# EAGLE board boardv2a (EAGLE 6.6.0), part 1 of 3
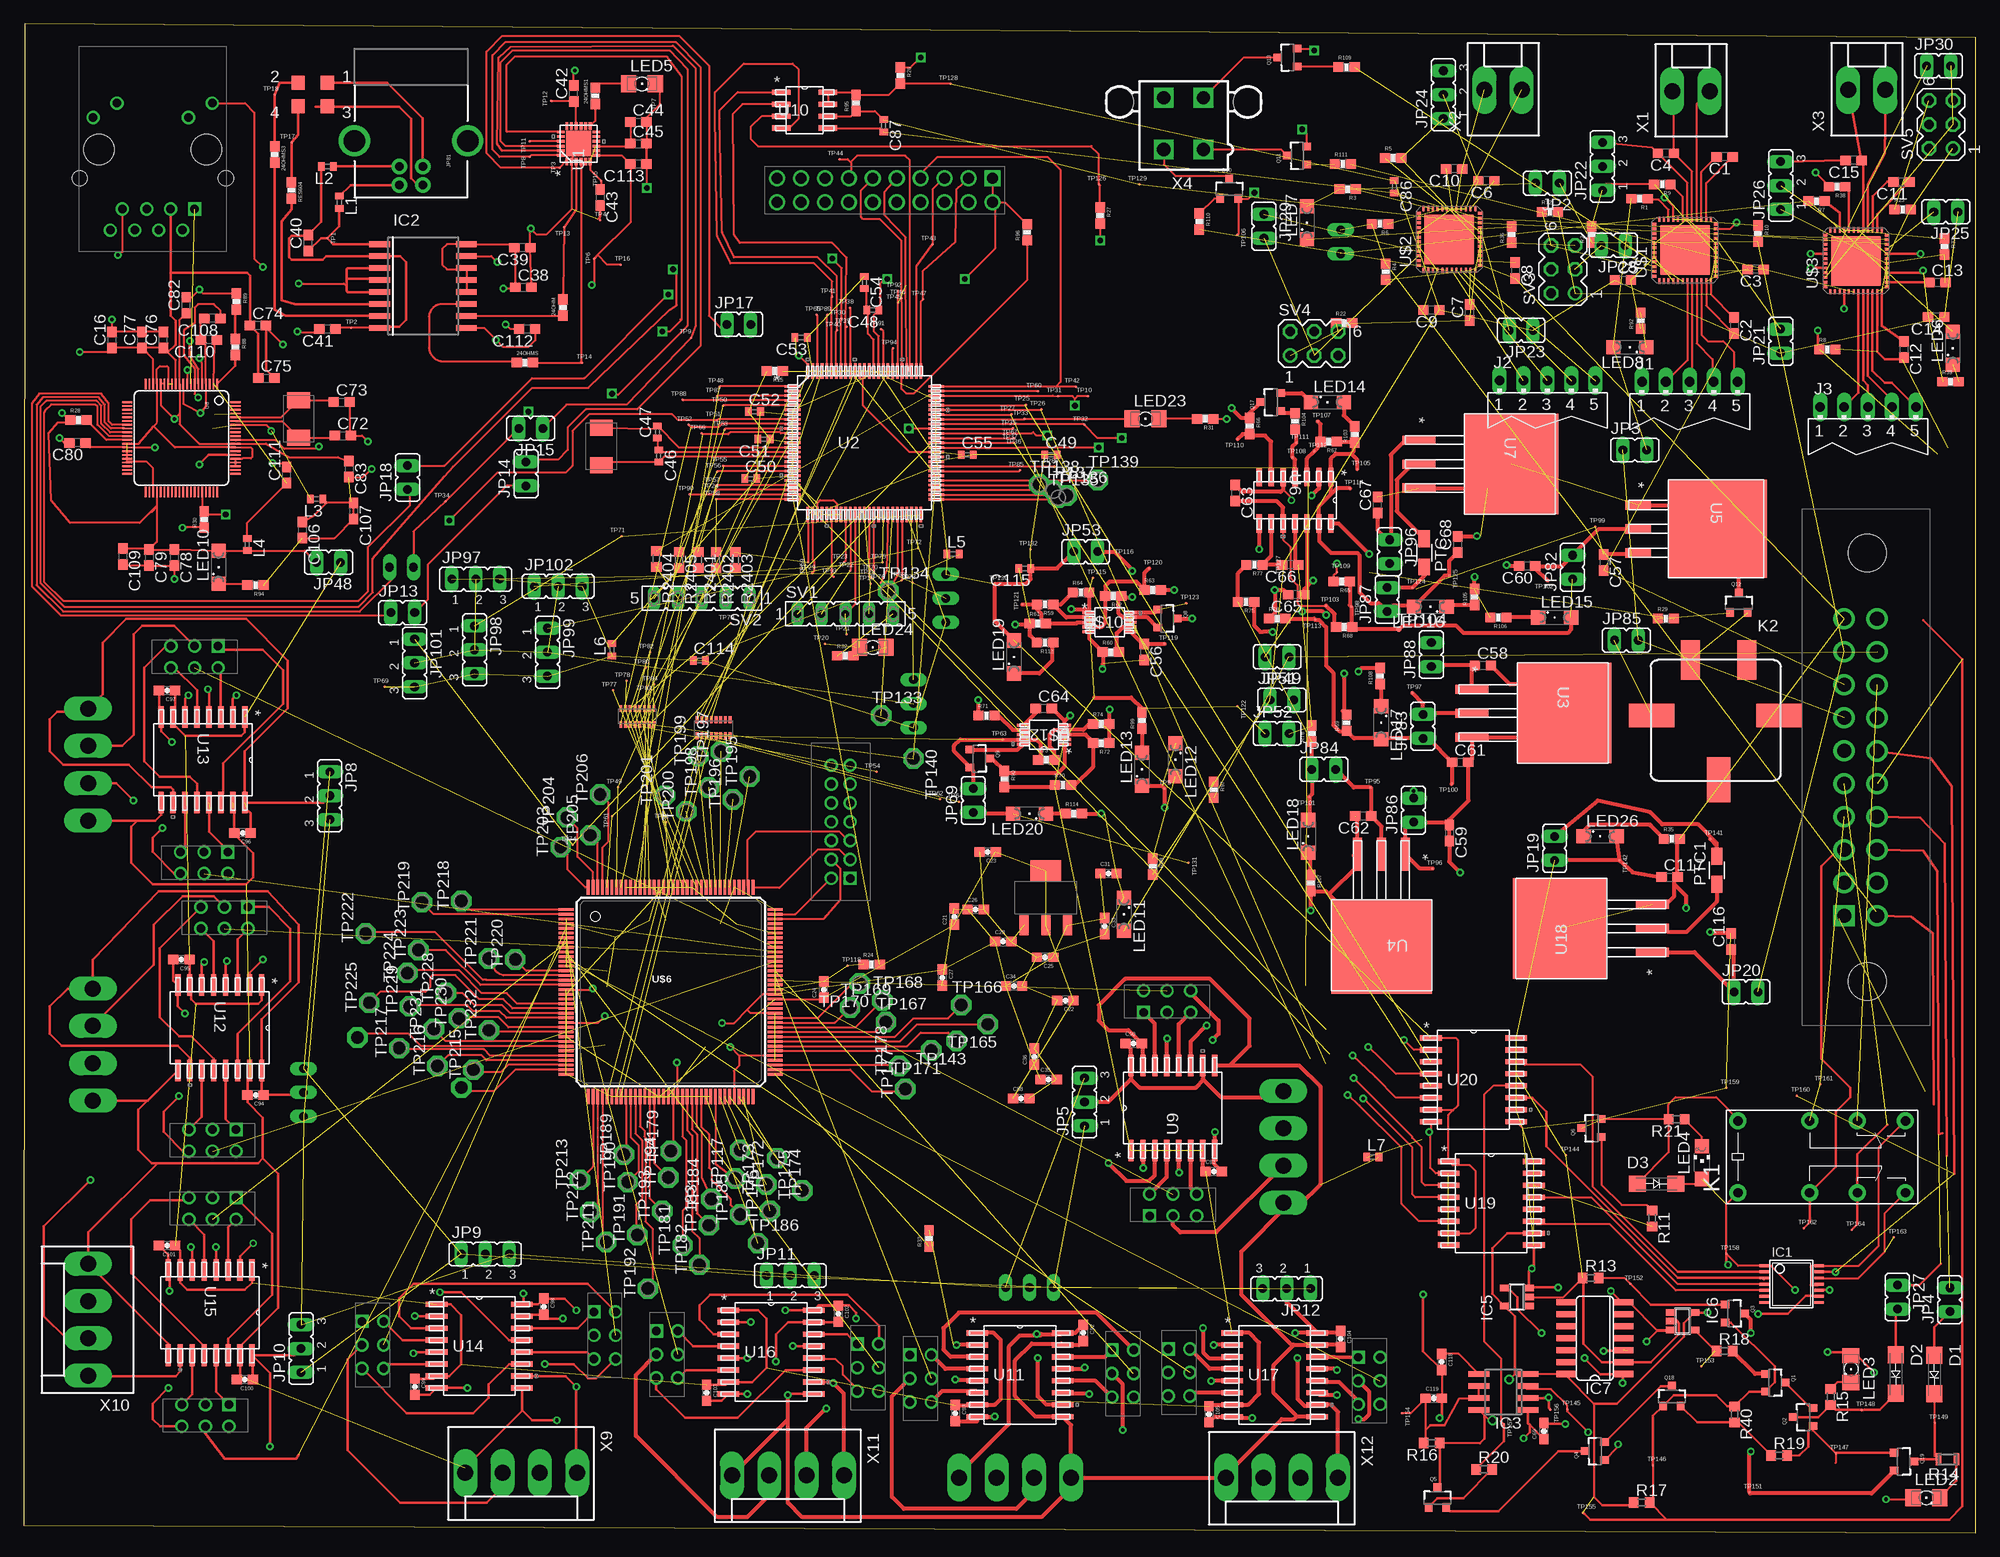
[diagram p0: board, top side]
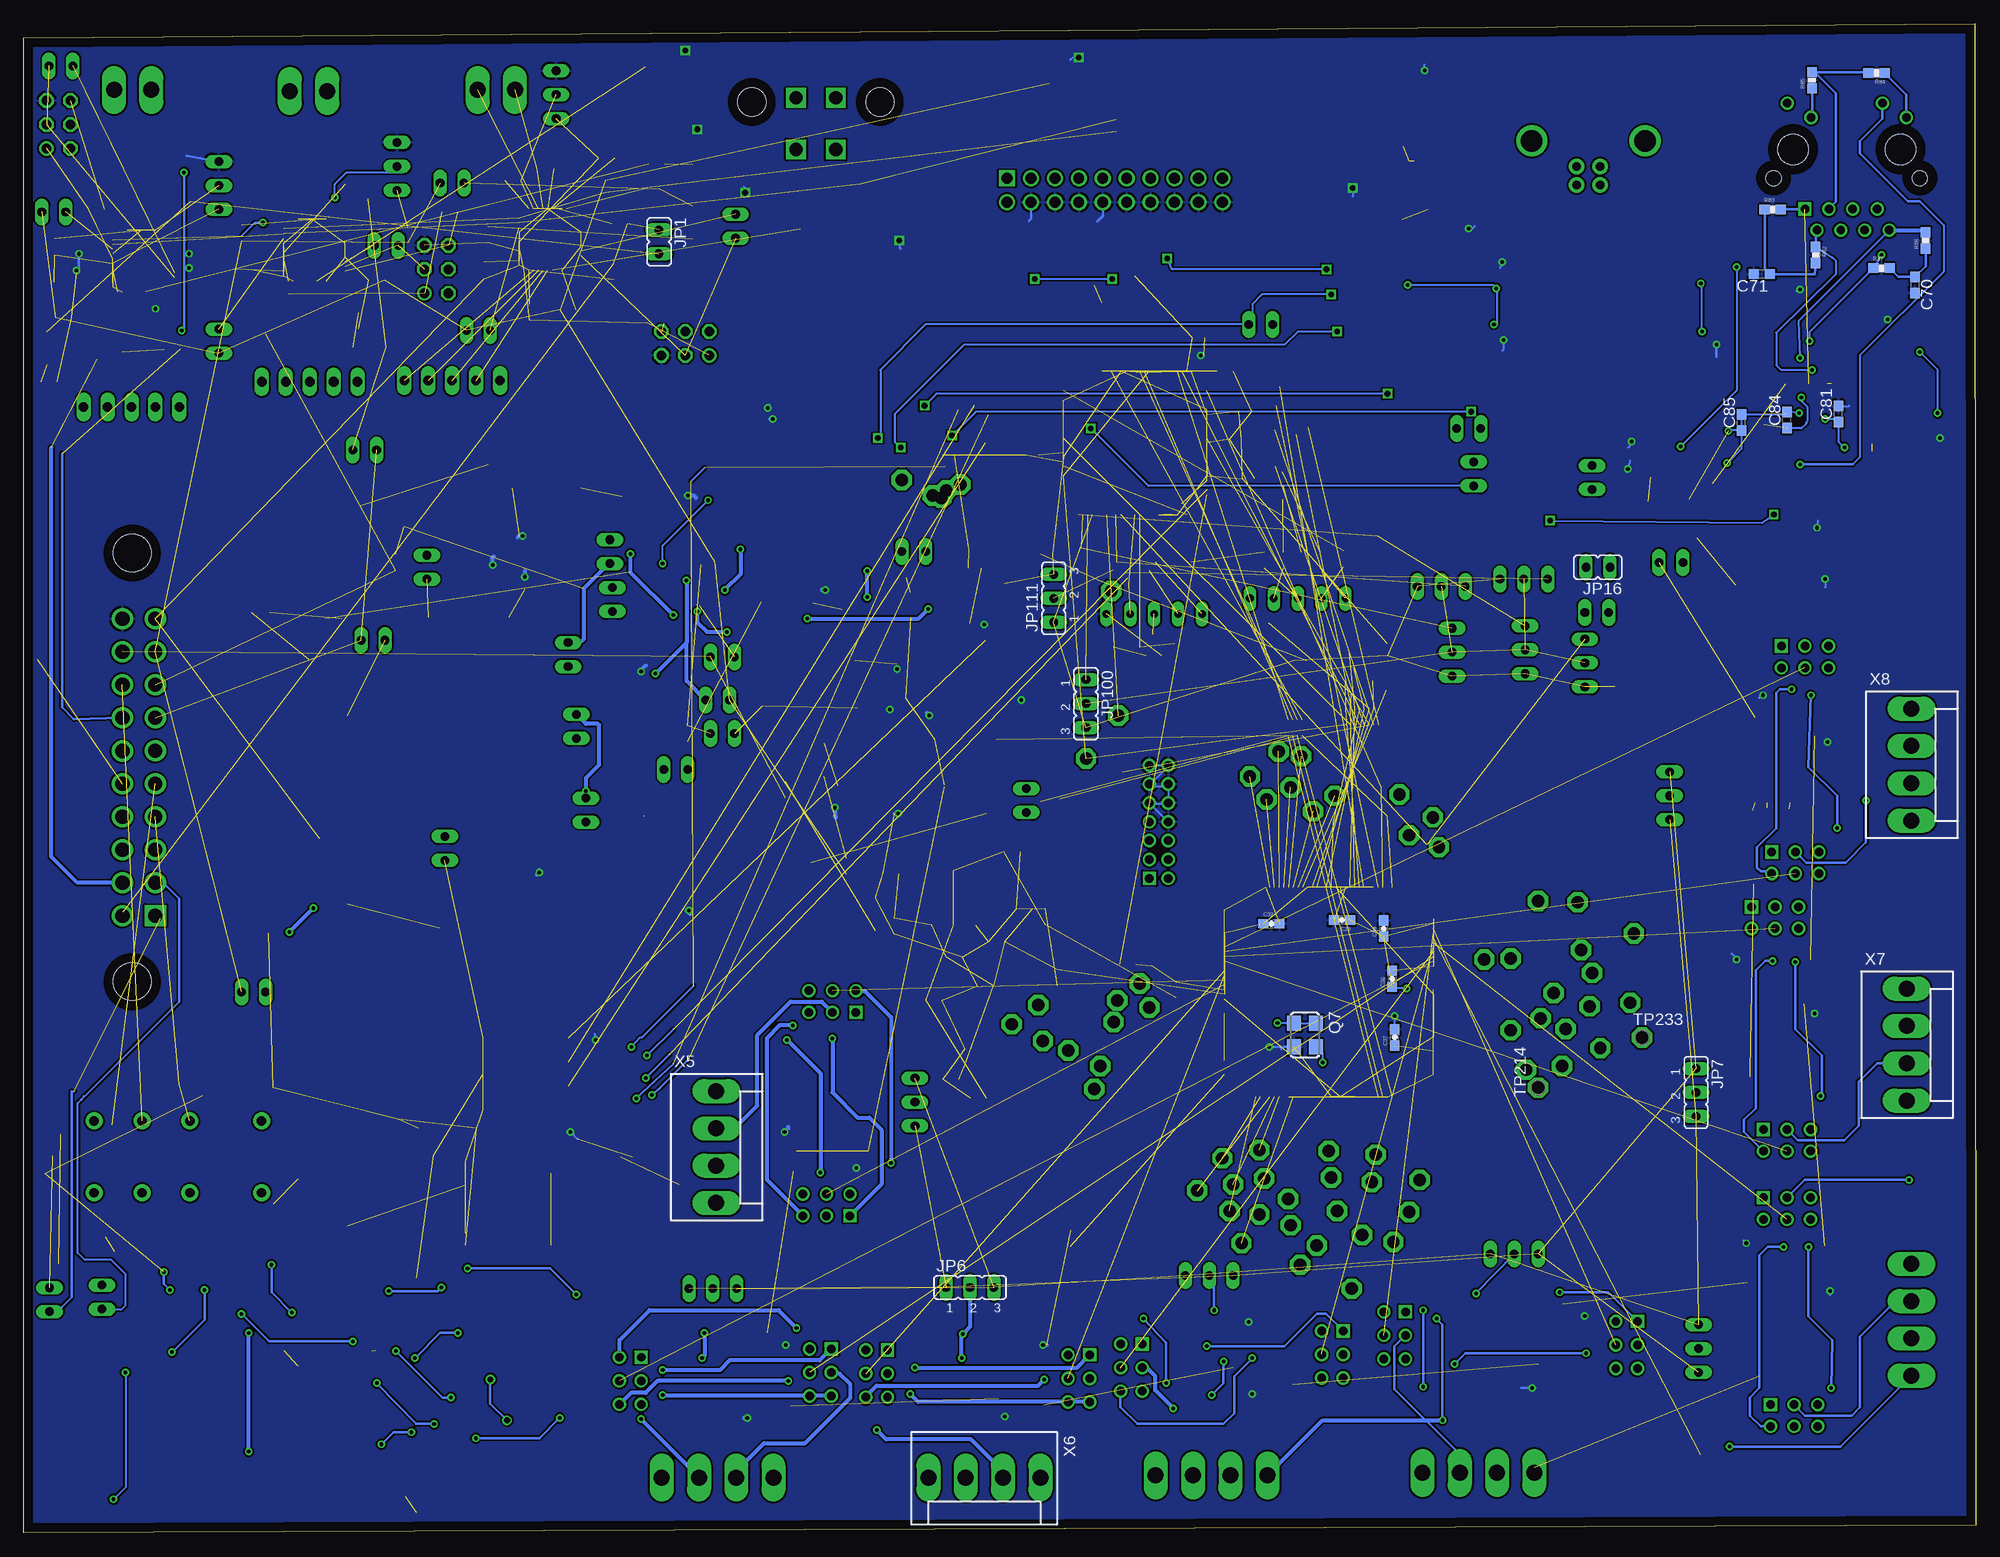
[diagram p1: board, bottom side, seen from below]

Size 207.29 x 160.22 mm. Coordinates in mm from the lower left corner, seen from the top.
Outline: 0,0.84 207.27,0 207.29,158.72 0.13,160.22 0,0.84
Copper layers (1*16): Top 0.035mm / dielectric 1.5mm / Bottom 0.035mm
Design rules "default": minimum track width 10mil, minimum drill 24mil, track to track 8mil, track to pad 8mil, pad to pad 8mil, via to via 8mil, smd to smd 8mil, copper to edge 40mil, drill to drill 8mil, minimum pad ring 10mil, minimum via ring 8mil, stop-mask expansion 4mil, vias tented up to drill 0mil, thermal gap 10mil
Net classes: 0 default: width 0.203 mm, drill 0.406 mm, clearance 0.102 mm

## Footprints (pad centres in the part's own frame; a part is rotated, then mirrored left to right if it is on the bottom)
0603-RES = smd 1.1 x 1: 1 -0.85,0; 2 0.85,0
C0603 = smd 1.1 x 1: 1 -0.85,0; 2 0.85,0
0603-CAP = smd 1.1 x 1: 1 -0.85,0; 2 0.85,0
C0402 = smd 0.7 x 0.9: 1 -0.65,0; 2 0.65,0
SMA-DO214AC = smd 1.8 x 1.7: A -2.05,0; K 2.05,0
TSSOP14 = smd 0.305 x 0.991: 1 -1.95,-2.918; 2 -1.3,-2.918; 3 -0.65,-2.918; 4 0,-2.918; 5 0.65,-2.918; 6 1.3,-2.918; 7 1.95,-2.918; 8 1.95,2.918; 9 1.3,2.918; 10 0.65,2.918; 11 0,2.918; 12 -0.65,2.918; 13 -1.3,2.918; 14 -1.95,2.918
SO16W = smd 0.6 x 2.2: 1 -4.445,-4.6; 2 -3.175,-4.6; 3 -1.905,-4.6; 4 -0.635,-4.6; 5 0.635,-4.6; 6 1.905,-4.6; 7 3.175,-4.6; 8 4.445,-4.6; 9 4.445,4.6; 10 3.175,4.6; 11 1.905,4.6; 12 0.635,4.6; 13 -0.635,4.6; 14 -1.905,4.6; 15 -3.175,4.6; 16 -4.445,4.6
SO08 = smd 0.6 x 2.2: 1 -1.905,-2.6; 2 -0.635,-2.6; 3 0.635,-2.6; 4 1.905,-2.6; 5 1.905,2.6; 6 0.635,2.6; 7 -0.635,2.6; 8 -1.905,2.6
SOT23-5 = smd 0.69 x 0.99: 1 -0.95,-1.29; 2 0,-1.29; 3 0.95,-1.29; 4 0.95,1.3; 5 -0.95,1.3
SO14 = smd 0.66 x 2.032: 1 -3.81,-3.073; 2 -2.54,-3.073; 3 -1.27,-3.073; 4 0,-3.073; 5 1.27,-3.073; 6 2.54,-3.073; 7 3.81,-3.073; 8 3.81,3.073; 9 2.54,3.073; 10 1.27,3.073; 11 0,3.073; 12 -1.27,3.073; 13 -2.54,3.073; 14 -3.81,3.073
JU05 = drill 1.016 long: 1 -5.08,0; 2 -2.54,0; 3 0,0; 4 2.54,0; 5 5.08,0
JP1 = drill 0.914 long: 1 0,-1.27; 2 0,1.27
JP2 = drill 0.914 long: 1 -2.54,0; 2 0,0; 3 2.54,0
USB-B-PTH = drill 0.914 pad 1.676: D+ 0,1.25; D- 1.981,1.25; GND 0,-1.25; VBUS 1.981,-1.25 | drill 2.286: S1 -2.718,-6.02; S2 -2.718,6.02
G5V-2 = drill 1 pad 1.8: 1 -8.89,-3.81; 4 -1.27,-3.81; 6 3.81,-3.81; 8 8.89,-3.81; 9 8.89,3.81; 11 3.81,3.81; 13 -1.27,3.81; 16 -8.89,3.81
CP1SA = smd 2 x 4.2: 1 3,-5.9; 2 -3,-5.9 | smd 4.8 x 2.5: C 7.1,0; NO -6.4,0 | smd 2.5 x 4.8: NC 0,6.8
0402 = smd 0.7 x 0.9: 1 -0.65,0; 2 0.65,0
1206 = smd 1.6 x 1.803: A -1.422,0; C 1.422,0
CHIPLED_1206 = smd 1.5 x 1.5: A 0,-1.75; C 0,1.75
LED_1206 = smd 1.6 x 1.803: A -1.422,0; C 1.422,0
SML1206 = smd 1.5 x 1.5: A 1.75,0; C -1.75,0
R1206W = smd 1.8 x 1.2: 1 -1.499,0; 2 1.499,0
SOT23-3 = smd 0.8 x 0.9: 1 -0.95,-1; 2 0.95,-1; 3 0,1.1
ASF = smd 1.6 x 1.5: 1 -1.25,-1.15; 2 1.25,-1.15; 3 1.25,1.15; 4 -1.25,1.15
R0603 = smd 1 x 1.1: 1 -0.85,0; 2 0.85,0
MINI_MELF-0102W = smd 0.6 x 1.3: 1 -0.95,0; 2 0.95,0
FE05-1 = drill 0.813 long: 1 -5.08,0; 2 -2.54,0; 3 0,0; 4 2.54,0; 5 5.08,0
MA03-2 = drill 1.016: 1 -2.54,-1.27 | drill 1.016 octagon: 2 -2.54,1.27; 3 0,-1.27; 4 0,1.27; 5 2.54,-1.27; 6 2.54,1.27
B1,27 = smd 0.254 x 0.254: TP 0,0
B2,54 = smd 0.254 x 0.254: TP 0,0
TP06R = smd 0.6 x 0.6: TP 0,0
P1-13 = drill 1.321 pad 2.159 octagon: TP 0,0
QFN24_4X4 = smd 0.813 x 0.305: 1 -1.88,1.245; 2 -1.88,0.762; 3 -1.88,0.254; 4 -1.88,-0.254; 5 -1.88,-0.762; 6 -1.88,-1.245; 13 1.88,-1.245; 14 1.88,-0.762; 15 1.88,-0.254; 16 1.88,0.254; 17 1.88,0.762; 18 1.88,1.245 | smd 0.305 x 0.813: 7 -1.245,-1.88; 8 -0.762,-1.88; 9 -0.254,-1.88; 10 0.254,-1.88; 11 0.762,-1.88; 12 1.245,-1.88; 19 1.245,1.88; 20 0.762,1.88; 21 0.254,1.88; 22 -0.254,1.88; 23 -0.762,1.88; 24 -1.245,1.88 | smd 2.692 x 2.692: 25 0,0
PZ100 = smd 1.676 x 0.279: 1 -7.62,5.994; 2 -7.62,5.512; 3 -7.62,5.004; 4 -7.62,4.496; 5 -7.62,3.988; 6 -7.62,3.505; 7 -7.62,2.997; 8 -7.62,2.489; 9 -7.62,2.007; 10 -7.62,1.499; 11 -7.62,0.991; 12 -7.62,0.508; 13 -7.62,0; 14 -7.62,-0.508; 15 -7.62,-0.991; 16 -7.62,-1.499; 17 -7.62,-2.007; 18 -7.62,-2.489; 19 -7.62,-2.997; 20 -7.62,-3.505; 21 -7.62,-3.988; 22 -7.62,-4.496; 23 -7.62,-5.004; 24 -7.62,-5.512; 25 -7.62,-5.994; 51 7.62,-5.994; 52 7.62,-5.512; 53 7.62,-5.004; 54 7.62,-4.496; 55 7.62,-3.988; 56 7.62,-3.505; 57 7.62,-2.997; 58 7.62,-2.489; 59 7.62,-2.007; 60 7.62,-1.499; 61 7.62,-0.991; 62 7.62,-0.508; 63 7.62,0; 64 7.62,0.508; 65 7.62,0.991; 66 7.62,1.499; 67 7.62,2.007; 68 7.62,2.489; 69 7.62,2.997; 70 7.62,3.505; 71 7.62,3.988; 72 7.62,4.496; 73 7.62,5.004; 74 7.62,5.512; 75 7.62,5.994 | smd 0.279 x 1.676: 26 -5.994,-7.62; 27 -5.512,-7.62; 28 -5.004,-7.62; 29 -4.496,-7.62; 30 -3.988,-7.62; 31 -3.505,-7.62; 32 -2.997,-7.62; 33 -2.489,-7.62; 34 -2.007,-7.62; 35 -1.499,-7.62; 36 -0.991,-7.62; 37 -0.508,-7.62; 38 0,-7.62; 39 0.508,-7.62; 40 0.991,-7.62; 41 1.499,-7.62; 42 2.007,-7.62; 43 2.489,-7.62; 44 2.997,-7.62; 45 3.505,-7.62; 46 3.988,-7.62; 47 4.496,-7.62; 48 5.004,-7.62; 49 5.512,-7.62; 50 5.994,-7.62; 76 5.994,7.62; 77 5.512,7.62; 78 5.004,7.62; 79 4.496,7.62; 80 3.988,7.62; 81 3.505,7.62; 82 2.997,7.62; 83 2.489,7.62; 84 2.007,7.62; 85 1.499,7.62; 86 0.991,7.62; 87 0.508,7.62; 88 0,7.62; 89 -0.508,7.62; 90 -0.991,7.62; 91 -1.499,7.62; 92 -2.007,7.62; 93 -2.489,7.62; 94 -2.997,7.62; 95 -3.505,7.62; 96 -3.988,7.62; 97 -4.496,7.62; 98 -5.004,7.62; 99 -5.512,7.62; 100 -5.994,7.62
KTT3 = smd 0.965 x 3.505: 1 -2.54,-9.677; 2 0,-9.677; 3 2.54,-9.677 | smd 10.668 x 9.957: 4 0,0.152
TS3B = smd 1.016 x 2.692: 1 -2.54,-8.28; 2 0,-8.28; 3 2.54,-8.28 | smd 10.414 x 10.465: 4 0,0.152
D14 = smd 1.981 x 0.559: 1 -2.464,3.81; 2 -2.464,2.54; 3 -2.464,1.27; 4 -2.464,0; 5 -2.464,-1.27; 6 -2.464,-2.54; 7 -2.464,-3.81; 8 2.464,-3.81; 9 2.464,-2.54; 10 2.464,-1.27; 11 2.464,0; 12 2.464,1.27; 13 2.464,2.54; 14 2.464,3.81
LQFP-80 = smd 0.19 x 1.1: 1 -3.8,-5.75; 2 -3.4,-5.75; 3 -3,-5.75; 4 -2.6,-5.75; 5 -2.2,-5.75; 6 -1.8,-5.75; 7 -1.4,-5.75; 8 -1,-5.75; 9 -0.6,-5.75; 10 -0.2,-5.75; 11 0.2,-5.75; 12 0.6,-5.75; 13 1,-5.75; 14 1.4,-5.75; 15 1.8,-5.75; 16 2.2,-5.75; 17 2.6,-5.75; 18 3,-5.75; 19 3.4,-5.75; 20 3.8,-5.75; 41 3.8,5.75; 42 3.4,5.75; 43 3,5.75; 44 2.6,5.75; 45 2.2,5.75; 46 1.8,5.75; 47 1.4,5.75; 48 1,5.75; 49 0.6,5.75; 50 0.2,5.75; 51 -0.2,5.75; 52 -0.6,5.75; 53 -1,5.75; 54 -1.4,5.75; 55 -1.8,5.75; 56 -2.2,5.75; 57 -2.6,5.75; 58 -3,5.75; 59 -3.4,5.75; 60 -3.8,5.75 | smd 1.1 x 0.19: 21 5.75,-3.8; 22 5.75,-3.4; 23 5.75,-3; 24 5.75,-2.6; 25 5.75,-2.2; 26 5.75,-1.8; 27 5.75,-1.4; 28 5.75,-1; 29 5.75,-0.6; 30 5.75,-0.2; 31 5.75,0.2; 32 5.75,0.6; 33 5.75,1; 34 5.75,1.4; 35 5.75,1.8; 36 5.75,2.2; 37 5.75,2.6; 38 5.75,3; 39 5.75,3.4; 40 5.75,3.8; 61 -5.75,3.8; 62 -5.75,3.4; 63 -5.75,3; 64 -5.75,2.6; 65 -5.75,2.2; 66 -5.75,1.8; 67 -5.75,1.4; 68 -5.75,1; 69 -5.75,0.6; 70 -5.75,0.2; 71 -5.75,-0.2; 72 -5.75,-0.6; 73 -5.75,-1; 74 -5.75,-1.4; 75 -5.75,-1.8; 76 -5.75,-2.2; 77 -5.75,-2.6; 78 -5.75,-3; 79 -5.75,-3.4; 80 -5.75,-3.8
RW_16 = smd 2.286 x 0.559: 1 -4.528,4.445; 2 -4.528,3.175; 3 -4.528,1.905; 4 -4.528,0.635; 5 -4.528,-0.635; 6 -4.528,-1.905; 7 -4.528,-3.175; 8 -4.528,-4.445; 9 4.528,-4.445; 10 4.528,-3.175; 11 4.528,-1.905; 12 4.528,-0.635; 13 4.528,0.635; 14 4.528,1.905; 15 4.528,3.175; 16 4.528,4.445
D8 = smd 1.981 x 0.559: 1 -2.464,1.905; 2 -2.464,0.635; 3 -2.464,-0.635; 4 -2.464,-1.905; 5 2.464,-1.905; 6 2.464,-0.635; 7 2.464,0.635; 8 2.464,1.905
QFN48 = smd 0.55 x 0.3: 1 -3.275,2.75; 2 -3.275,2.25; 3 -3.275,1.75; 4 -3.275,1.25; 5 -3.275,0.75; 6 -3.275,0.25; 7 -3.275,-0.25; 8 -3.275,-0.75; 9 -3.275,-1.25; 10 -3.275,-1.75; 11 -3.275,-2.25; 12 -3.275,-2.75; 25 3.275,-2.75; 26 3.275,-2.25; 27 3.275,-1.75; 28 3.275,-1.25; 29 3.275,-0.75; 30 3.275,-0.25; 31 3.275,0.25; 32 3.275,0.75; 33 3.275,1.25; 34 3.275,1.75; 35 3.275,2.25; 36 3.275,2.75 | smd 0.3 x 0.55: 13 -2.75,-3.275; 14 -2.25,-3.275; 15 -1.75,-3.275; 16 -1.25,-3.275; 17 -0.75,-3.275; 18 -0.25,-3.275; 19 0.25,-3.275; 20 0.75,-3.275; 21 1.25,-3.275; 22 1.75,-3.275; 23 2.25,-3.275; 24 2.75,-3.275; 37 2.75,3.275; 38 2.25,3.275; 39 1.75,3.275; 40 1.25,3.275; 41 0.75,3.275; 42 0.25,3.275; 43 -0.25,3.275; 44 -0.75,3.275; 45 -1.25,3.275; 46 -1.75,3.275; 47 -2.25,3.275; 48 -2.75,3.275 | smd 5.309 x 5.309: EXP 0,0
MNR18 = smd 0.3 x 0.7: P$1 -1,-1; P$2 -1,0.7; P$3 -0.5,-1; P$4 -0.5,0.7; P$5 0,-1; P$6 0,0.7; P$7 0.5,-1; P$8 0.5,0.7; P$9 1,-1; P$10 1,0.7; P$11 1.5,-1; P$12 1.5,0.7; P$13 2,-1; P$14 2,0.7; P$15 2.5,-1; P$16 2.5,0.7
34830-2001 = drill 1.5 square: P$1 -15.75,1.75 | drill 1.5: P$2 -12.25,1.75; P$3 -8.75,1.75; P$4 -5.25,1.75; P$5 -1.75,1.75; P$6 1.75,1.75; P$7 5.25,1.75; P$8 8.75,1.75; P$9 12.25,1.75; P$10 15.75,1.75; P$11 -15.75,-1.75; P$12 -12.25,-1.75; P$13 -8.75,-1.75; P$14 -5.25,-1.75; P$15 -1.75,-1.75; P$16 1.72,-1.75; P$17 5.25,-1.75; P$18 8.75,-1.75; P$19 12.25,-1.75; P$20 15.75,-1.75 | hole 4: -22.75,-0.71; 22.75,-0.71
TQ144 = smd 1.6 x 0.3: P1 -11.1,8.75; P2 -11.1,8.25; P3 -11.1,7.75; P4 -11.1,7.25; P5 -11.1,6.75; P6 -11.1,6.25; P7 -11.1,5.75; P8 -11.1,5.25; P9 -11.1,4.75; P10 -11.1,4.25; P11 -11.1,3.75; P12 -11.1,3.25; P13 -11.1,2.75; P14 -11.1,2.25; P15 -11.1,1.75; P16 -11.1,1.25; P17 -11.1,0.75; P18 -11.1,0.25; P19 -11.1,-0.25; P20 -11.1,-0.75; P21 -11.1,-1.25; P22 -11.1,-1.75; P23 -11.1,-2.25; P24 -11.1,-2.75; P25 -11.1,-3.25; P26 -11.1,-3.75; P27 -11.1,-4.25; P28 -11.1,-4.75; P29 -11.1,-5.25; P30 -11.1,-5.75; P31 -11.1,-6.25; P32 -11.1,-6.75; P33 -11.1,-7.25; P34 -11.1,-7.75; P35 -11.1,-8.25; P36 -11.1,-8.75; P73 11.1,-8.75; P74 11.1,-8.25; P75 11.1,-7.75; P76 11.1,-7.25; P77 11.1,-6.75; P78 11.1,-6.25; P79 11.1,-5.75; P80 11.1,-5.25; P81 11.1,-4.75; P82 11.1,-4.25; P83 11.1,-3.75; P84 11.1,-3.25; P85 11.1,-2.75; P86 11.1,-2.25; P87 11.1,-1.75; P88 11.1,-1.25; P89 11.1,-0.75; P90 11.1,-0.25; P91 11.1,0.25; P92 11.1,0.75; P93 11.1,1.25; P94 11.1,1.75; P95 11.1,2.25; P96 11.1,2.75; P97 11.1,3.25; P98 11.1,3.75; P99 11.1,4.25; P100 11.1,4.75; P101 11.1,5.25; P102 11.1,5.75; P103 11.1,6.25; P104 11.1,6.75; P105 11.1,7.25; P106 11.1,7.75; P107 11.1,8.25; P108 11.1,8.75 | smd 0.3 x 1.6: P37 -8.75,-11.1; P38 -8.25,-11.1; P39 -7.75,-11.1; P40 -7.25,-11.1; P41 -6.75,-11.1; P42 -6.25,-11.1; P43 -5.75,-11.1; P44 -5.25,-11.1; P45 -4.75,-11.1; P46 -4.25,-11.1; P47 -3.75,-11.1; P48 -3.25,-11.1; P49 -2.75,-11.1; P50 -2.25,-11.1; P51 -1.75,-11.1; P52 -1.25,-11.1; P53 -0.75,-11.1; P54 -0.25,-11.1; P55 0.25,-11.1; P56 0.75,-11.1; P57 1.25,-11.1; P58 1.75,-11.1; P59 2.25,-11.1; P60 2.75,-11.1; P61 3.25,-11.1; P62 3.75,-11.1; P63 4.25,-11.1; P64 4.75,-11.1; P65 5.25,-11.1; P66 5.75,-11.1; P67 6.25,-11.1; P68 6.75,-11.1; P69 7.25,-11.1; P70 7.75,-11.1; P71 8.25,-11.1; P72 8.75,-11.1; P109 8.75,11.1; P110 8.25,11.1; P111 7.75,11.1; P112 7.25,11.1; P113 6.75,11.1; P114 6.25,11.1; P115 5.75,11.1; P116 5.25,11.1; P117 4.75,11.1; P118 4.25,11.1; P119 3.75,11.1; P120 3.25,11.1; P121 2.75,11.1; P122 2.25,11.1; P123 1.75,11.1; P124 1.25,11.1; P125 0.75,11.1; P126 0.25,11.1; P127 -0.25,11.1; P128 -0.75,11.1; P129 -1.25,11.1; P130 -1.75,11.1; P131 -2.25,11.1; P132 -2.75,11.1; P133 -3.25,11.1; P134 -3.75,11.1; P135 -4.25,11.1; P136 -4.75,11.1; P137 -5.25,11.1; P138 -5.75,11.1; P139 -6.25,11.1; P140 -6.75,11.1; P141 -7.25,11.1; P142 -7.75,11.1; P143 -8.25,11.1; P144 -8.75,11.1
JTAG14PIN = drill 0.9 square: P$1 -5.08,-1.27 | drill 0.9: P$2 -5.08,0.73; P$3 -3.08,-1.27; P$4 -3.08,0.73; P$5 -1.08,-1.27; P$6 -1.08,0.73; P$7 0.92,-1.27; P$8 0.92,0.73; P$9 2.92,-1.27; P$10 2.92,0.73; P$11 4.92,-1.27; P$12 4.92,0.73; P$13 6.92,-1.27; P$14 6.92,0.73
ACM3225-2P = smd 1.4 x 1.5: 1 0,0; 2 3.1,0; 3 0,2.5; 4 3.1,2.5
15-80-0201 = drill 1.143 square: P$1 0,0 | drill 1.143: P$2 0,2.54; P$3 2.54,0; P$4 2.54,2.54; P$5 5.08,0; P$6 5.08,2.54; P$7 7.62,0; P$8 7.62,2.54; P$9 10.16,0; P$10 10.16,2.54; P$11 12.7,0; P$12 12.7,2.54; P$13 15.24,0; P$14 15.24,2.54; P$15 17.78,0; P$16 17.78,2.54; P$17 20.32,0; P$18 20.32,2.54; P$19 22.86,0; P$20 22.86,2.54
MUB10A = smd 1.372 x 0.33: 1 -2.184,0.991; 2 -2.184,0.508; 3 -2.184,0; 4 -2.184,-0.508; 5 -2.184,-0.991; 6 2.184,-0.991; 7 2.184,-0.508; 8 2.184,0; 9 2.184,0.508; 10 2.184,0.991
SOT-223 = smd 0.95 x 2.15: 1 -2.3,-2.9; 2 0,-2.9; 3 2.3,-2.9 | smd 3.25 x 2.15: 4 0,2.9
JS202011 = drill 0.9 square: 1 -2.5,-1.15 | drill 0.9: 2 0,-1.15; 3 2.5,-1.15; 4 -2.5,1.15; 5 0,1.15; 6 2.5,1.15
2-SMD = smd 1.7 x 2.4: P$1 -2,0; P$2 2,0
RB1-125BAG1A = drill 0.9: L1 14.2,7.51; L2 11.66,5.99; L3 4.09,7.51; L4 1.55,5.99; R2 4.7,19.475; R3 5.97,17.23; R4 7.24,19.475; R5 8.51,17.23; R6 9.78,19.475; R7 11.11,17.23; R8 12.38,19.475 | drill 0.9 square: R1 3.43,17.23 | hole 1.6: 0.1,13.94; 15.65,13.94 | hole 3.25: 13.59,10.89; 2.16,10.89
KK-156-2 = drill 1.7 pad 2.184 long: 1 -1.98,0; 2 1.98,0
5566-4 = drill 1.4 square: 1 2.1,-2.75; 2 -2.1,-2.75; 3 2.1,2.75; 4 -2.1,2.75 | hole 3: 6.8,2.29; -6.8,2.29
KK-156-4 = drill 1.7 pad 2.184 long: 1 -5.94,0; 2 -1.98,0; 3 1.98,0; 4 5.94,0

## Placement (x,y rotation side)
24OHM  [0603-RES]  57.28,130.07 90 top
24OHMS  [0603-RES]  53.21,124.23 0 top
24OHMS1  600Ohms  [0603-RES]  60.71,152.55 90 top
24OHMS3  24  [0603-RES]  26.67,146.33 270 top
C1  47nF  [C0603]  180.59,146.08 180 top
C2  220nF  [C0603]  181.61,128.17 270 top
C3  1uF  [C0603]  183.9,134.14 180 top
C4  220pf  [C0603]  174.37,146.46 180 top
C5  4.7UF  [C0603]  169.8,132.99 0 top
C6  47nF  [C0603]  155.32,143.54 180 top
C7  220nF  [C0603]  153.54,129.57 90 top
C8  1uF  [C0603]  158.37,134.01 270 top
C9  4.7UF  [C0603]  149.48,129.82 180 top
C10  220pf  [C0603]  151.89,144.81 180 top
C11  47nF  [C0603]  199.39,143.41 180 top
C12  220nF  [C0603]  199.64,125.63 270 top
C13  1uF  [C0603]  203.2,132.74 0 top
C14  4.7UF  [C0603]  203.07,129.06 180 top
C15  220pf  [C0603]  194.31,145.69 180 top
C16  0.1uF  [C0603]  9.4,126.64 90 top
C21  10uF  [0603-CAP]  98.81,65.43 90 top
C22  10uF  [0603-CAP]  110.62,56.54 180 top
C23  10uF  [0603-CAP]  102.36,72.29 180 top
C24  1uF  [0603-CAP]  84.96,57.68 90 top
C25  10uF  [0603-CAP]  108.46,61.11 180 top
C26  10uF  [0603-CAP]  101.09,66.19 0 top
C27  10uF  [0603-CAP]  97.54,58.95 270 top
C28  10uF  [0603-CAP]  104.01,62.76 0 top
C29  1uF  [0603-CAP]  67.31,65.05 180 bottom
C30  1uF  [0603-CAP]  61.98,58.83 90 bottom
C31  1uF  [0603-CAP]  115.19,70 0 top
C32  1uF  [0603-CAP]  74.8,64.67 0 bottom
C33  1uF  [0603-CAP]  114.81,64.41 270 top
C34  1uF  [0603-CAP]  105.16,58.06 0 top
C35  1uF  [0603-CAP]  108.84,48.16 0 top
C36  1uF  [0603-CAP]  107.32,50.57 90 top
C37  1uF  [0603-CAP]  61.72,52.6 90 bottom
C38  0.1uF  [C0603]  53.09,132.23 0 top
C39  0.1uF  [C0603]  52.96,136.42 180 top
C40  0.1uF  [C0603]  30.23,136.93 90 top
C41  0.1uF  [C0603]  32.26,127.79 180 top
C42  4.7uf  [C0603]  58.42,152.81 90 top
C43  0.1uF  [C0603]  61.21,141.76 270 top
C44  0.1uF  [C0603]  65.28,149.76 0 top
C45  0.1uF  [C0603]  65.28,147.47 0 top
C46  18pf  [C0402]  67.44,114.33 270 top
C47  18pf  [C0402]  67.31,116.87 90 top
C48  0.1uf  [C0402]  90.17,129.82 180 top
C49  0.1 uF  [C0402]  109.09,114.45 0 top
C50  0.1uF  [C0402]  77.22,111.91 0 top
C51  0.1uF  [C0402]  78.61,116.1 180 top
C52  22uF  [C0402]  77.6,119.02 0 top
C53  0.1uf  [C0402]  82.55,126.9 180 top
C54  0.1uf  [C0402]  89.28,132.74 270 top
C55  0.1uf  [C0402]  100.2,114.45 0 top
C56  [C0603]  119,93.5 270 top
C57  10u  [C0603]  167.77,103.02 270 top
C58  10u  [C0603]  154.94,92.1 0 top
C59  10u  [C0603]  151.38,74.32 270 top
C60  10u  [C0603]  159.64,102.64 180 top
C61  10u  [C0603]  152.53,81.81 0 top
C62  10u  [C0603]  142.24,76.1 180 top
C63  .1u  [C0603]  128.65,110.39 270 top
C64  [C0603]  108.33,87.53 0 top
C65  .1u  [C0603]  135.13,99.59 180 top
C66  .1u  [C0603]  134.49,102.77 180 top
C67  10u  [C0603]  143.76,109.12 90 top
C68  10u  [C0603]  152.27,104.93 90 top
C69  .1uF  [0603-CAP]  161.42,10.82 90 top
C70  0.1uF  [C0603]  6.48,132.49 270 bottom
C71  0.1uF  [C0603]  22.73,133.63 180 bottom
C72  18pf  [C0603]  33.91,116.48 0 top
C73  18pf  [C0603]  33.78,120.04 0 top
C74  0.1uf  [C0603]  24.89,128.17 0 top
C75  0.1uf  [C0603]  25.78,122.58 0 top
C76  0.1  [C0603]  14.86,126.64 90 top
C77  0.1uf  [C0603]  12.57,126.64 90 top
C78  0.1uf  [C0603]  16,103.53 270 top
C79  0.1uf  [C0603]  13.34,103.53 270 top
C80  0.1uf  [C0603]  5.72,115.72 180 top
C81  0.1uf  [C0603]  14.61,118.77 90 bottom
C82  0.1uf  [C0603]  17.27,130.33 90 top
C83  0.1uf  [C0603]  34.54,112.93 270 top
C84  0.1uf  [C0603]  20.07,118.14 90 bottom
C85  0.1uf  [C0603]  24.89,117.88 90 bottom
C86  0.1 uF  [C0402]  145.54,142.9 270 top
C87  0.1 uF  [C0402]  91.31,149.38 270 top
C88  10uF  [0603-CAP]  105.92,46.13 0 top
C89  1uF  [0603-CAP]  62.86,64.16 90 bottom
C90  .1uF  [0603-CAP]  117.86,51.97 0 top
C91  .1uF  [0603-CAP]  126.37,38.38 0 top
C92  .1uF  [0603-CAP]  112.52,21.23 270 top
C93  .1uF  [0603-CAP]  98.93,12.73 270 top
C94  .1uF  [0603-CAP]  24.64,46.51 180 top
C95  .1uF  [0603-CAP]  16.76,60.86 180 top
C96  .1uF  [0603-CAP]  23.24,74.32 180 top
C97  .1uF  [0603-CAP]  15.24,89.43 180 top
C98  .1uF  [0603-CAP]  55.25,24.03 270 top
C99  .1uF  [0603-CAP]  41.53,15.52 270 top
C100  .1uF  [0603-CAP]  23.5,16.28 180 top
C101  .1uF  [0603-CAP]  15.24,30.51 180 top
C102  .1uF  [0603-CAP]  86.49,23.27 270 top
C103  .1uF  [0603-CAP]  72.52,14.88 270 top
C104  .1uF  [0603-CAP]  139.83,20.6 270 top
C105  .1uF  [0603-CAP]  125.86,12.6 270 top
C106  3.3uf  [C0603]  29.59,106.45 270 top
C107  10uf  [C0603]  35.05,108.48 270 top
C108  10uf  [C0603]  20.07,128.93 180 top
C109  0.1uf  [C0603]  10.54,103.66 270 top
C110  0.1uf  [C0603]  19.69,126.64 180 top
C111  0.1uf  [C0603]  27.94,112.29 90 top
C112  1uF  [C0603]  53.47,127.79 180 top
C113  0.1uF  [C0603]  65.28,145.31 180 top
C114  .1uF  [C0402]  71.75,92.61 0 top
C115  .1uF  [C0402]  106.3,102.39 180 top
C116  10u  [C0603]  181.28,62.79 90 top
C117  10u  [C0603]  174.75,69.62 0 top
C118  10nF  [0603-CAP]  150.57,18.16 270 top
C119  10nF  [0603-CAP]  149.73,14.3 0 top
D1  GF1  [SMA-DO214AC]  202.87,16.81 270 top
D2  GF1  [SMA-DO214AC]  198.78,16.87 270 top
D3  GF1  [SMA-DO214AC]  173.38,37.08 0 top
IC1  MCP41HVX1ST  [TSSOP14]  187.71,26.42 270 top
IC2  ADUM4160BRW  [SO16W]  42.42,132.36 270 top
IC3  SE555D  [SO08]  157.12,14.96 90 top
IC5  74LVC1G04DBV  [SOT23-5]  158.55,25.04 90 top
IC6  74LVC1G04DBV  [SOT23-5]  176.15,22.48 270 top
IC7  4030D  [SO14]  166.83,20.68 90 top
J1  [JU05]  176.91,122.2 0 top
J2  [JU05]  161.8,122.33 0 top
J3  [JU05]  195.83,119.53 0 top
JP1  [JP1]  139.83,137.06 180 bottom
JP2  [JP1]  161.8,143.28 90 top
JP3  [JP1]  171.07,114.96 270 top
JP4  [JP1]  204.52,24.77 0 top
JP5  [JP2]  112.65,45.75 90 top
JP6  [JP2]  106.81,26.06 0 bottom
JP7  [JP2]  29.72,46.76 270 bottom
JP8  [JP2]  32.51,78.26 270 top
JP9  [JP2]  49.02,29.62 0 top
JP10  [JP2]  29.46,19.58 90 top
JP11  [JP2]  81.41,27.33 0 top
JP12  [JP2]  134.11,25.93 180 top
JP13  [JP1]  40.26,97.69 270 top
JP14  [JP1]  53.34,112.42 0 top
JP15  [JP1]  53.85,117.25 90 top
JP16  [JP1]  40.13,102.51 90 bottom
JP17  [JP1]  75.95,128.3 270 top
JP18  [JP1]  40.77,112.04 0 top
JP19  [JP1]  162.56,72.67 0 top
JP20  [JP1]  182.88,57.43 270 top
JP21  [JP1]  186.56,126.52 0 top
JP22  [JP2]  167.64,145.06 90 top
JP23  [JP1]  159,127.66 90 top
JP24  [JP2]  150.75,152.68 90 top
JP25  [JP1]  204.09,140.23 90 top
JP26  [JP2]  186.56,143.03 90 top
JP27  [JP1]  198.96,25.04 180 top
JP28  [JP1]  168.78,136.68 90 top
JP29  [JP1]  131.7,138.71 180 top
JP30  [JP1]  203.33,155.73 270 top
JP48  [JP1]  32.39,103.02 90 top
JP49  [JP1]  133.1,92.99 90 top
JP51  [JP1]  133.6,88.42 270 top
JP52  [JP1]  133.1,84.86 270 top
JP53  [JP1]  112.78,104.17 270 top
JP69  [JP1]  100.84,77.75 0 top
JP81  USB-B  [USB-B-PTH]  41.15,145.06 270 top
JP82  [JP1]  164.47,102.51 0 top
JP83  [JP1]  148.59,85.62 0 top
JP84  [JP1]  138.05,81.05 270 top
JP85  [JP1]  170.18,94.77 270 top
JP86  [JP1]  147.57,76.73 0 top
JP87  [JP1]  144.78,99.09 0 top
JP88  [JP1]  149.48,93.24 0 top
JP96  [JP1]  145.03,104.17 180 top
JP97  [JP2]  48.01,101.24 0 top
JP98  [JP2]  47.88,93.75 270 top
JP99  [JP2]  55.63,93.5 270 top
JP100  [JP2]  94.49,88.04 270 bottom
JP101  [JP2]  41.53,92.35 270 top
JP102  [JP2]  56.77,100.48 0 top
JP111  [JP2]  97.92,99.21 90 bottom
K1  G5V-2  [G5V-2]  190.91,39.93 0 top
K2  CP1SA-12V  [CP1SA]  179.96,86.77 180 top
L1  BLM15HB121SN1  [0402]  33.53,141.25 270 top
L2  BLM15HB121SN1  [0402]  32.26,145.06 180 top
L3  BLM15HB121SN1  [0402]  31.12,109.75 180 top
L4  BLM15HB121SN1  [0402]  23.75,104.93 270 top
L5  BLM15HB121SN1  [0402]  98.68,103.91 0 top
L6  BLM15HB121SN1  [0402]  62.48,93.75 90 top
L7  BLM15HB121SN1  [0402]  143.26,39.9 0 top
LED2  GREEN  [1206]  202.03,3.76 0 top
LED3  GREEN  [1206]  194.03,17.4 270 top
LED4  [CHIPLED_1206]  178.21,39.32 0 top
LED5  [LED_1206]  65.66,153.82 0 top
LED6  [SML1206]  204.85,125.76 90 top
LED7  [SML1206]  136.27,139.09 90 top
LED8  [SML1206]  170.56,125.88 180 top
LED10  [SML1206]  20.7,102.51 90 top
LED11  [SML1206]  116.84,65.68 270 top
LED12  [SML1206]  122.3,82.07 270 top
LED13  [SML1206]  118.75,81.05 90 top
LED14  [SML1206]  138.43,120.04 0 top
LED15  [SML1206]  162.56,97.18 0 top
LED16  [SML1206]  149.35,98.32 180 top
LED17  [SML1206]  144.14,86 270 top
LED18  [SML1206]  136.4,73.94 90 top
LED19  [SML1206]  105.16,92.99 90 top
LED20  [SML1206]  106.81,76.35 180 top
LED23  [LED_1206]  119.13,118.26 0 top
LED24  [LED_1206]  90.17,94.01 0 top
LED26  [SML1206]  167.39,73.94 0 top
PTC  [R1206W]  148.72,104.04 270 top
PTC1  [R1206W]  179.78,70.36 90 top
Q1  IRLML2060TRPBFBSS123LT1G  [SOT23-3]  185.95,15.95 270 top
Q2  IRLML2060TRPBFBSS123LT1G  [SOT23-3]  188.98,12.29 90 top
Q3  IRLML2060TRPBFBSS123LT1G  [SOT23-3]  181.64,23.29 270 top
Q4  MOSFET-PCHANNEL  [SOT23-3]  166.88,8.69 90 top
Q5  MOSFET-PCHANNEL  [SOT23-3]  150.11,3.71 0 top
Q6  IRLML2060TRPBFBSS123LT1G  [SOT23-3]  166.52,42.98 90 top
Q7  ASFL1  [ASF]  71.25,52.86 270 bottom
Q8  IRLML2060TRPBFBSS123LT1G  [SOT23-3]  121.41,97.05 270 top
Q9  IRLML2060TRPBFBSS123LT1G  [SOT23-3]  101.47,82.19 270 top
Q10  IRLML2060TRPBFBSS123LT1G  [SOT23-3]  128.02,142.65 0 top
Q11  IRLML2060TRPBFBSS123LT1G  [SOT23-3]  135.25,146.2 90 top
Q12  IRLML2060TRPBFBSS123LT1G  [SOT23-3]  182.12,98.7 0 top
Q13  IRLML2060TRPBFBSS123LT1G  [SOT23-3]  134.24,156.62 90 top
Q17  IRLML2060TRPBFBSS123LT1G  [SOT23-3]  132.46,120.04 90 top
Q18  MOSFET-PCHANNEL  [SOT23-3]  175.01,14.48 0 top
Q19  IRLML2060TRPBFBSS123LT1G  [SOT23-3]  199.62,7.57 270 top
R1  2.2KOHM  [0603-RES]  171.58,141.63 180 top
R2  100UOHMS  [0603-RES]  166.5,137.82 90 top
R3  2.2KOHM  [0603-RES]  140.59,142.65 180 top
R4  100UOHMS  [0603-RES]  144.63,133.88 270 top
R5  500ohm  [0603-RES]  145.41,145.95 0 top
R6  500ohm  [0603-RES]  144.02,138.96 180 top
R7  2.2KOHM  [0603-RES]  190.37,141.38 180 top
R8  100UOHMS  [0603-RES]  191.52,125.63 0 top
R9  500ohm  [0603-RES]  173.99,143.15 180 top
R10  500ohm  [0603-RES]  184.15,137.95 270 top
R11  150  [R0603]  172.92,33.4 270 top
R12  3.3k  [0603-RES]  162.05,140.23 0 top
R13  10K  [R0603]  166.4,27.08 0 top
R14  1K  [MINI_MELF-0102W]  204.27,7.82 180 top
R15  1K  [R0603]  191.87,14.45 270 top
R16  1K  [R0603]  149.5,9.55 180 top
R17  10K  [R0603]  171.81,3.25 0 top
R18  10K  [R0603]  180.59,19.3 0 top
R19  10K  [R0603]  186.41,8.23 0 top
R20  10K  [R0603]  155.07,6.76 0 top
R21  1K  [R0603]  175.49,43.92 180 top
R22  3.3k  [0603-RES]  140.21,128.42 0 top
R23  3.3k  [0603-RES]  199.52,140.49 0 top
R24  1k  [0603-RES]  90.04,60.35 0 top
R25  1k  [0603-RES]  79.76,123.34 180 top
R26  1k  [0603-RES]  93.09,154.71 270 top
R27  1k  [0603-RES]  114.3,139.85 270 top
R28  1k  [0603-RES]  5.84,118.14 0 top
R29  [0603-RES]  174.37,97.05 0 top
R30  10k  [0603-RES]  19.18,107.59 90 top
R31  600  [0603-RES]  125.48,118.26 180 top
R32  600  [0603-RES]  87.25,93.12 0 top
R33  10k  [0603-RES]  96.14,31.27 90 top
R35  [0603-RES]  175.01,73.69 0 top
R36  560ohms  [0603-RES]  157.99,137.82 90 top
R37  500ohm  [0603-RES]  203.96,136.55 270 top
R38  500ohm  [0603-RES]  192.53,142.9 180 top
R39  560ohms  [0603-RES]  204.6,122.2 0 top
R40  10K  [R0603]  181.66,12.6 270 top
R59  [0603-RES]  108.46,98.58 180 top
R60  [0603-RES]  115.44,93.5 0 top
R61  [0603-RES]  107.7,96.55 0 top
R62  [0603-RES]  115.7,99.47 180 top
R63  [0603-RES]  119.89,100.1 0 top
R64  [0603-RES]  112.27,99.85 0 top
R65  470k  [0603-RES]  139.95,100.99 180 top
R66  470k  [0603-RES]  130.18,117.5 270 top
R67  470k  [0603-RES]  138.56,115.85 180 top
R68  .01  [0603-RES]  140.21,96.16 180 top
R69  .01  [0603-RES]  140.46,86 90 top
R70  [0603-RES]  110.36,79.4 0 top
R71  [0603-RES]  102.23,86.77 0 top
R72  [0603-RES]  114.43,83.85 180 top
R73  [0603-RES]  108.59,82.07 0 top
R74  [0603-RES]  114.43,85.88 0 top
R75  1k  [0603-RES]  129.79,98.83 180 top
R76  .01  [0603-RES]  136.78,84.86 90 top
R77  470k  [0603-RES]  130.68,102.77 180 top
R78  470k  [0603-RES]  133.1,97.05 0 top
R82  51  [0603-RES]  17.02,135.66 270 bottom
R83  51  [0603-RES]  21.59,140.49 0 bottom
R84  200  [0603-RES]  10.54,154.97 180 bottom
R85  200  [0603-RES]  17.4,154.2 90 bottom
R86  51  [0603-RES]  5.33,137.19 90 bottom
R87  51  [0603-RES]  10.03,134.26 0 bottom
R88  16  [0603-RES]  22.48,125.88 270 top
R89  300  [0603-RES]  22.61,130.71 270 top
R90  [0603-RES]  104.14,80.04 270 top
R92  560ohms  [0603-RES]  171.7,128.68 90 top
R94  560ohms  [0603-RES]  24.64,100.61 180 top
R95  1k  [0603-RES]  88.39,151.79 90 top
R96  10k  [0603-RES]  106.55,138.07 90 top
R97  .01  [0603-RES]  126.37,78.89 270 top
R98  .01  [0603-RES]  119.89,70.76 270 top
R99  .01  [0603-RES]  118.75,86.26 90 top
R103  .01  [0603-RES]  141.35,116.61 90 top
R104  .01  [0603-RES]  135,118.01 270 top
R105  [0603-RES]  154.05,99.34 90 top
R106  [0603-RES]  156.59,97.18 180 top
R107  [0603-RES]  136.65,68.99 270 top
R108  [0603-RES]  144.02,90.96 90 top
R109  [0603-RES]  140.46,155.6 0 top
R110  [0603-RES]  124.84,139.22 270 top
R111  [0603-RES]  140.08,145.31 0 top
R113  [0603-RES]  108.46,94.51 180 top
R114  [0603-RES]  111.51,76.35 0 top
R2401  1k  [R0603]  71.63,103.28 270 top
R2402  1k  [R0603]  73.53,103.28 270 top
R2403  1k  [R0603]  75.56,103.28 270 top
R2404  1k  [R0603]  67.18,103.4 270 top
R2405  1k  [R0603]  69.6,103.28 270 top
RES604  24  [0603-RES]  28.45,142.52 270 top
SV1  [FE05-1]  87.25,97.56 0 top
SV2  [FE05-1]  72.01,99.21 180 top
SV3  [MA03-2]  163.45,134.14 90 top
SV4  [MA03-2]  137.03,126.26 0 top
SV5  [MA03-2]  203.58,149.5 90 top
TP1  TPB1,27  [B1,27]  32.26,137.44 270 top
TP2  TPB1,27  [B1,27]  34.8,127.91 0 top
TP3  TPB1,27  [B1,27]  56.9,144.93 90 top
TP4  TPB1,27  [B1,27]  61.21,139.34 0 top
TP5  TPB1,27  [B1,27]  121.16,79.02 0 top
TP6  TPB1,27  [B1,27]  60.58,135.28 90 top
TP7  TPB1,27  [B1,27]  67.56,151.66 90 top
TP8  TPB2,54  [B2,54]  53.72,146.08 90 top
TP9  TPB2,54  [B2,54]  70.87,126.9 0 top
TP10  TPB2,54  [B2,54]  113.03,120.68 0 top
TP11  TPB2,54  [B2,54]  53.72,147.73 90 top
TP12  TPB1,27  [B1,27]  56.01,152.04 90 top
TP13  TPB1,27  [B1,27]  57.4,138.58 180 top
TP14  TPB1,27  [B1,27]  59.31,124.23 0 top
TP15  TPB1,27  [B1,27]  61.34,143.54 90 top
TP16  TPB1,27  [B1,27]  63.37,134.65 0 top
TP17  TPB2,54  [B2,54]  28.45,147.6 0 top
TP18  TPB2,54  [B2,54]  26.67,152.68 0 top
TP19  TPB2,54  [B2,54]  89.92,100.74 0 top
TP20  TPB2,54  [B2,54]  85.09,94.39 0 top
TP21  TPB2,54  [B2,54]  87.38,95.4 0 top
TP22  TPB2,54  [B2,54]  87.76,102.13 0 top
TP23  TPB2,54  [B2,54]  87.12,103.02 0 top
TP24  TPB2,54  [B2,54]  73.41,110.52 0 top
TP25  TPB2,54  [B2,54]  106.43,119.79 0 top
TP26  TPB2,54  [B2,54]  108.08,119.28 0 top
TP27  TPB2,54  [B2,54]  104.9,118.77 0 top
TP28  TPB2,54  [B2,54]  90.04,101.37 0 top
TP29  TPB2,54  [B2,54]  83.69,101.88 0 top
TP30  TPB2,54  [B2,54]  86.87,128.93 0 top
TP31  TPB2,54  [B2,54]  109.86,120.68 0 top
TP32  TPB2,54  [B2,54]  112.65,117.63 0 top
TP33  TPB2,54  [B2,54]  106.3,118.26 0 top
TP34  TPB2,54  [B2,54]  44.83,109.5 0 top
TP35  TPB2,54  [B2,54]  105.03,117.25 0 top
TP36  TPB2,54  [B2,54]  105.54,115.21 0 top
TP37  TPB2,54  [B2,54]  105.16,115.72 0 top
TP38  TPB2,54  [B2,54]  87.76,130.07 0 top
TP39  TPB2,54  [B2,54]  87.38,128.04 0 top
TP40  TPB2,54  [B2,54]  86.36,127.66 0 top
TP41  TPB2,54  [B2,54]  85.85,131.22 0 top
TP42  TPB2,54  [B2,54]  111.76,121.69 0 top
TP43  TPB2,54  [B2,54]  96.52,136.8 0 top
TP44  TPB2,54  [B2,54]  86.61,145.82 0 top
TP45  TPB2,54  [B2,54]  92.84,130.58 0 top
TP46  TPB2,54  [B2,54]  93.22,131.09 0 top
TP47  TPB2,54  [B2,54]  95.5,130.96 0 top
TP48  TPB2,54  [B2,54]  73.91,121.69 0 top
TP49  TPB2,54  [B2,54]  63.12,79.15 0 top
TP50  TPB2,54  [B2,54]  74.3,119.66 0 top
TP51  TPB2,54  [B2,54]  73.66,118.14 0 top
TP52  TPB2,54  [B2,54]  70.61,117.63 0 top
TP53  TPB2,54  [B2,54]  74.42,117.12 0 top
TP54  TPB2,54  [B2,54]  90.55,80.8 0 top
TP55  TPB2,54  [B2,54]  74.3,113.31 0 top
TP56  TPB2,54  [B2,54]  73.66,112.67 0 top
TP57  TPB2,54  [B2,54]  73.53,111.15 0 top
TP58  TPB2,54  [B2,54]  73.53,109.75 0 top
TP59  TPB2,54  [B2,54]  83.31,103.02 90 top
TP60  TPB2,54  [B2,54]  107.7,121.18 0 top
TP61  TPB2,54  [B2,54]  62.48,76.1 90 top
TP62  TPB2,54  [B2,54]  97.28,77.88 0 top
TP63  TPB2,54  [B2,54]  104.01,84.23 0 top
TP64  TPB2,54  [B2,54]  99.31,77.62 0 top
TP65  TPB2,54  [B2,54]  84.2,129.31 0 top
TP66  TPB2,54  [B2,54]  72.01,116.74 0 top
TP67  TPB2,54  [B2,54]  105.16,116.23 0 top
TP68  TPB2,54  [B2,54]  93.22,101.12 0 top
TP69  TPB2,54  [B2,54]  38.35,89.81 0 top
TP70  TPB2,54  [B2,54]  90.3,101.88 0 top
TP71  TPB2,54  [B2,54]  63.5,105.82 0 top
TP72  TPB2,54  [B2,54]  95,104.55 0 top
TP73  TPB2,54  [B2,54]  94.36,100.86 0 top
TP74  TPB2,54  [B2,54]  58.29,73.05 0 top
TP75  TPB2,54  [B2,54]  91.19,103.02 0 top
TP76  TPB2,54  [B2,54]  91.06,100.86 0 top
TP77  TPB2,54  [B2,54]  62.61,89.43 0 top
TP78  TPB2,54  [B2,54]  64.01,90.45 0 top
TP79  TPB2,54  [B2,54]  75.06,96.55 0 top
TP80  TPB2,54  [B2,54]  66.04,91.85 0 top
TP81  TPB2,54  [B2,54]  68.2,75.46 0 top
TP82  TPB2,54  [B2,54]  66.55,93.5 0 top
TP83  TPB2,54  [B2,54]  66.29,89.05 0 top
TP84  TPB2,54  [B2,54]  66.93,90.07 0 top
TP85  TPB2,54  [B2,54]  105.79,112.8 0 top
TP86  TPB2,54  [B2,54]  109.47,113.18 0 top
TP87  TPB2,54  [B2,54]  73.66,120.68 0 top
TP88  TPB2,54  [B2,54]  69.98,120.29 0 top
TP89  TPB2,54  [B2,54]  85.34,129.31 0 top
TP90  TPB2,54  [B2,54]  70.74,110.26 0 top
TP91  TPB2,54  [B2,54]  91.06,127.79 0 top
TP92  TPB2,54  [B2,54]  92.84,131.85 0 top
TP93  TPB2,54  [B2,54]  85.98,101.5 0 top
TP94  TPB2,54  [B2,54]  92.33,125.76 0 top
TP95  TPB1,27  [B1,27]  143,79.15 0 top
TP96  TPB1,27  [B1,27]  149.61,70.51 0 top
TP97  TPB1,27  [B1,27]  147.45,89.18 0 top
TP98  TPB1,27  [B1,27]  140.97,98.32 270 top
TP99  TPB1,27  [B1,27]  166.88,106.83 0 top
TP100  TPB1,27  [B1,27]  151.64,79.53 180 top
TP101  TPB1,27  [B1,27]  136.53,78.13 180 top
TP102  TPB1,27  [B1,27]  161.8,101.12 180 top
TP103  TPB1,27  [B1,27]  138.3,98.45 0 top
TP104  TPTP06R  [TP06R]  146.05,95.91 0 top
TP105  TPB1,27  [B1,27]  141.6,112.93 0 top
TP106  TPB1,27  [B1,27]  128.91,137.82 270 top
TP107  TPB1,27  [B1,27]  137.41,118.01 0 top
TP108  TPB1,27  [B1,27]  134.75,114.2 0 top
TP109  TPB1,27  [B1,27]  139.45,102.01 0 top
TP110  TPB1,27  [B1,27]  128.91,116.1 180 top
TP111  TPB1,27  [B1,27]  135.13,115.72 0 top
TP112  TPB1,27  [B1,27]  137.03,114.83 0 top
TP113  TPB1,27  [B1,27]  137.16,96.93 180 top
TP114  TPB1,27  [B1,27]  140.84,110.9 0 top
TP115  TPB1,27  [B1,27]  113.54,101.37 0 top
TP116  TPB1,27  [B1,27]  116.46,103.53 0 top
TP117  TPPAD1-13  [P1-13]  75.56,37.62 90 top
TP118  TPB1,27  [B1,27]  87.5,60.22 0 top
TP119  TPB1,27  [B1,27]  121.16,94.39 0 top
TP120  TPB1,27  [B1,27]  119.51,102.39 0 top
TP121  TPB1,27  [B1,27]  106.05,98.58 90 top
TP122  TPB1,27  [B1,27]  128.91,87.78 270 top
TP123  TPB1,27  [B1,27]  123.44,98.7 0 top
TP124  TPB1,27  [B1,27]  147.45,100.36 0 top
TP125  TPB1,27  [B1,27]  151.38,101.63 270 top
TP126  TPB2,54  [B2,54]  114.17,143.15 0 top
TP127  TPB2,54  [B2,54]  133.86,103.02 90 top
TP128  TPB2,54  [B2,54]  98.43,153.82 0 top
TP129  TPB2,54  [B2,54]  118.49,143.15 0 top
TP130  TPB1,27  [B1,27]  103.12,100.74 0 top
TP131  TPB1,27  [B1,27]  123.7,71.15 270 top
TP132  TPB2,54  [B2,54]  106.93,104.42 0 top
TP133  TPPAD1-13  [P1-13]  91.06,86.77 0 top
TP134  TPPAD1-13  [P1-13]  91.82,99.97 0 top
TP135  TPPAD1-13  [P1-13]  109.86,109.88 0 top
TP136  TPPAD1-13  [P1-13]  110.74,110.13 0 top
TP137  TPPAD1-13  [P1-13]  109.35,110.64 0 top
TP138  TPPAD1-13  [P1-13]  107.82,111.28 0 top
TP139  TPPAD1-13  [P1-13]  114.05,111.79 0 top
TP140  TPPAD1-13  [P1-13]  94.49,82.19 270 top
TP141  TPB1,27  [B1,27]  179.07,73.69 0 top
TP142  TPB1,27  [B1,27]  169.42,71.4 270 top
TP143  TPPAD1-13  [P1-13]  99.06,52.22 180 top
TP144  TPB1,27  [B1,27]  163.78,40.11 0 top
TP145  TPB1,27  [B1,27]  163.91,13.16 0 top
TP146  TPB1,27  [B1,27]  173,7.21 0 top
TP147  TPB1,27  [B1,27]  192.41,8.46 0 top
TP148  TPB1,27  [B1,27]  195.17,13.06 0 top
TP149  TPB1,27  [B1,27]  202.92,11.68 0 top
TP151  TPB1,27  [B1,27]  183.24,4.32 0 top
TP152  TPB1,27  [B1,27]  170.59,26.44 0 top
TP153  TPB1,27  [B1,27]  178.16,17.68 0 top
TP154  TPB1,27  [B1,27]  146.33,12.7 270 top
TP155  TPB1,27  [B1,27]  165.53,2.16 0 top
TP156  TPB1,27  [B1,27]  162.13,13.08 270 top
TP157  TPB1,27  [B1,27]  157.18,11.53 270 top
TP158  TPB1,27  [B1,27]  180.77,29.64 0 top
TP159  TPB1,27  [B1,27]  180.77,47.24 0 top
TP160  TPB1,27  [B1,27]  188.26,46.43 0 top
TP161  TPB1,27  [B1,27]  190.75,47.62 0 top
TP162  TPB1,27  [B1,27]  189.03,32.36 0 top
TP163  TPB1,27  [B1,27]  198.58,31.37 0 top
TP164  TPB1,27  [B1,27]  194.11,32.18 0 top
TP165  TPPAD1-13  [P1-13]  102.36,54 180 top
TP166  TPPAD1-13  [P1-13]  99.57,56.03 0 top
TP167  TPPAD1-13  [P1-13]  91.57,54.25 0 top
TP168  TPPAD1-13  [P1-13]  91.19,56.54 0 top
TP169  TPPAD1-13  [P1-13]  87.76,55.78 0 top
TP170  TPPAD1-13  [P1-13]  88.77,58.32 180 top
TP171  TPPAD1-13  [P1-13]  96.39,51.21 180 top
TP172  TPPAD1-13  [P1-13]  76.07,40.67 270 top
TP173  TPPAD1-13  [P1-13]  78.87,36.98 90 top
TP174  TPPAD1-13  [P1-13]  80.01,39.78 270 top
TP175  TPPAD1-13  [P1-13]  82.68,36.35 90 top
TP176  TPPAD1-13  [P1-13]  79.25,34.19 90 top
TP177  TPPAD1-13  [P1-13]  93.6,47.14 90 top
TP178  TPPAD1-13  [P1-13]  92.96,49.56 90 top
TP179  TPPAD1-13  [P1-13]  68.71,40.54 90 top
TP180  TPPAD1-13  [P1-13]  -22.1,58.45 90 top  (outside the outline)
TP181  TPPAD1-13  [P1-13]  69.98,30.51 90 top
TP182  TPPAD1-13  [P1-13]  71.75,28.47 90 top
TP183  TPPAD1-13  [P1-13]  72.77,32.66 90 top
TP184  TPPAD1-13  [P1-13]  73.03,35.46 90 top
TP185  TPPAD1-13  [P1-13]  76.07,33.81 90 top
TP186  TPPAD1-13  [P1-13]  77.98,30.76 0 top
TP187  TPPAD1-13  [P1-13]  -22.86,50.06 90 top  (outside the outline)
TP188  TPPAD1-13  [P1-13]  -18.03,44.73 90 top  (outside the outline)
TP189  TPPAD1-13  [P1-13]  63.75,40.16 90 top
TP190  TPPAD1-13  [P1-13]  64.14,37.24 90 top
TP191  TPPAD1-13  [P1-13]  65.15,31.65 90 top
TP192  TPPAD1-13  [P1-13]  66.29,25.93 90 top
TP193  TPPAD1-13  [P1-13]  67.82,34.19 90 top
TP194  TPPAD1-13  [P1-13]  68.45,37.74 90 top
TP195  TPPAD1-13  [P1-13]  77.09,80.29 90 top
TP196  TPPAD1-13  [P1-13]  75.31,77.88 90 top
TP197  TPPAD1-13  [P1-13]  74.04,82.96 90 top
TP198  TPPAD1-13  [P1-13]  72.77,79.15 90 top
TP199  TPPAD1-13  [P1-13]  71.63,82.45 90 top
TP200  TPPAD1-13  [P1-13]  70.36,76.61 90 top
TP201  TPPAD1-13  [P1-13]  68.07,78.26 90 top
TP202  TPPAD1-13  [P1-13]  -14.35,59.21 90 top  (outside the outline)
TP203  TPPAD1-13  [P1-13]  57.02,72.8 90 top
TP204  TPPAD1-13  [P1-13]  57.66,75.97 90 top
TP205  TPPAD1-13  [P1-13]  60.2,74.07 90 top
TP206  TPPAD1-13  [P1-13]  61.21,78.38 90 top
TP207  TPPAD1-13  [P1-13]  -23.88,64.54 90 top  (outside the outline)
TP208  TPPAD1-13  [P1-13]  -12.06,64.67 90 top  (outside the outline)
TP209  TPPAD1-13  [P1-13]  -10.79,56.54 90 top  (outside the outline)
TP210  TPPAD1-13  [P1-13]  -13.59,53.49 90 top  (outside the outline)
TP211  TPPAD1-13  [P1-13]  61.85,30.89 90 top
TP212  TPPAD1-13  [P1-13]  60.2,34.06 90 top
TP213  TPPAD1-13  [P1-13]  59.06,37.49 90 top
TP214  TPPAD1-13  [P1-13]  46.48,47.27 90 bottom
TP215  TPPAD1-13  [P1-13]  47.75,49.17 90 top
TP216  TPPAD1-13  [P1-13]  43.94,49.56 90 top
TP217  TPPAD1-13  [P1-13]  39.88,51.46 90 top
TP218  TPPAD1-13  [P1-13]  46.48,67.08 90 top
TP219  TPPAD1-13  [P1-13]  42.29,66.95 90 top
TP220  TPPAD1-13  [P1-13]  52.2,60.86 90 top
TP221  TPPAD1-13  [P1-13]  49.4,60.99 90 top
TP222  TPPAD1-13  [P1-13]  36.32,63.65 90 top
TP223  TPPAD1-13  [P1-13]  41.91,61.87 90 top
TP224  TPPAD1-13  [P1-13]  40.77,59.46 90 top
TP225  TPPAD1-13  [P1-13]  36.7,56.29 90 top
TP228  TPPAD1-13  [P1-13]  44.83,57.3 90 top
TP229  TPPAD1-13  [P1-13]  41.02,55.91 90 top
TP230  TPPAD1-13  [P1-13]  46.23,54.64 90 top
TP231  TPPAD1-13  [P1-13]  43.56,53.49 90 top
TP232  TPPAD1-13  [P1-13]  49.4,53.37 90 top
TP233  TPPAD1-13  [P1-13]  35.43,52.6 0 bottom
U1  CP2130-GM  [QFN24_4X4]  58.93,147.47 90 top
U2  TMS570LS0432_PZ_100  [PZ100]  89.28,115.72 0 top
U3  LM1085_KTT_3  [KTT3]  163.45,87.02 270 top
U4  LM1085_KTT_3  [KTT3]  144.17,62.38 180 top
U5  LM1084_KTT_3  [TS3B]  179.7,106.58 270 top
U6  TPS3514_D_14  [D14]  135,109.63 270 top
U7  LM1085_KTT_3  [KTT3]  157.81,113.46 270 top
U8  [LQFP-80]  16.76,116.23 180 top
U9  ADUM3442CRWZ  [RW_16]  122.02,45.11 90 top
U10  SN65HVDA100-Q1_D_8  [D8]  82.93,151.03 0 top
U11  ADUM3442CRWZ  [RW_16]  105.79,16.79 0 top
U12  ADUM3442CRWZ  [RW_16]  20.83,53.62 270 top
U13  ADUM3442CRWZ  [RW_16]  19.05,82.07 270 top
U14  ADUM3442CRWZ  [RW_16]  48.39,19.84 0 top
U15  ADUM3442CRWZ  [RW_16]  19.81,23.39 270 top
U16  ADUM3442CRWZ  [RW_16]  79.38,19.2 0 top
U17  ADUM3442CRWZ  [RW_16]  132.84,16.79 0 top
U18  LM1085_KTT_3  [KTT3]  163.27,64.19 90 top
U19  ADUM3442CRWZ  [RW_16]  155.83,35 0 top
U20  ADUM3442CRWZ  [RW_16]  153.95,48.11 0 top
U$1  [QFN48]  176.4,136.17 90 top
U$2  [QFN48]  151.38,137.31 90 top
U$3  [QFN48]  194.56,135.03 90 top
U$4  RHM1620CT-ND  [MNR18]  65.91,86.51 180 top
U$5  34830-2001  [34830-2001]  195.05,81.28 90 top
U$6  XC6SLX4-2TQG144C  [TQ144]  68.71,57.43 0 top
U$7  JTAG14PIN  [JTAG14PIN]  86.49,74.57 90 top
U$8  ACM3225-2P  [ACM3225-2P]  32.26,153.95 180 top
U$9  JTAG20PIN  [15-80-0201]  102.87,143.79 180 top
U$10  LM25061_DGS_10  [MUB10A]  115.32,96.67 0 top
U$11  1.2VREG  [SOT-223]  108.53,67.41 0 top
U$12  LM25061_DGS_10  [MUB10A]  108.33,84.73 180 top
U$13  DPDTSWITCH  [JS202011]  122.05,34.82 0 top
U$14  DPDTSWITCH  [JS202011]  121.41,56.41 0 top
U$15  7A-16.000MAAJ-T  [2-SMD]  61.34,115.34 90 top
U$16  DPDTSWITCH  [JS202011]  95.25,16.41 270 top
U$17  DPDTSWITCH  [JS202011]  116.71,16.92 270 top
U$18  DPDTSWITCH  [JS202011]  20.07,41.68 180 top
U$19  DPDTSWITCH  [JS202011]  21.34,65.3 180 top
U$20  DPDTSWITCH  [JS202011]  19.18,71.15 180 top
U$21  7A-16.000MAAJ-T  [2-SMD]  29.21,118.26 90 top
U$22  ETHERNET_CONNECTOR  [RB1-125BAG1A]  21.59,157.76 180 top
U$23  DPDTSWITCH  [JS202011]  18.16,92.99 180 top
U$24  DPDTSWITCH  [JS202011]  37.08,19.96 270 top
U$25  DPDTSWITCH  [JS202011]  61.72,20.98 270 top
U$26  DPDTSWITCH  [JS202011]  19.3,12.47 180 top
U$27  DPDTSWITCH  [JS202011]  20.07,34.44 180 top
U$28  DPDTSWITCH  [JS202011]  68.33,18.95 270 top
U$29  DPDTSWITCH  [JS202011]  89.66,17.55 270 top
U$30  DPDTSWITCH  [JS202011]  122.68,17.04 270 top
U$31  DPDTSWITCH  [JS202011]  142.88,16.15 270 top
U$32  RHM1620CT-ND  [MNR18]  72.52,85.62 0 top
X1  [KK-156-2]  177.04,153.06 0 top
X2  [KK-156-2]  157.1,153.19 0 top
X3  [KK-156-2]  195.71,153.19 0 top
X4  5566-4  [5566-4]  123.16,149.61 0 top
X5  [KK-156-4]  133.76,40.97 270 bottom
X6  [KK-156-4]  105.28,5.87 180 bottom
X7  [KK-156-4]  7.37,51.84 270 bottom
X8  [KK-156-4]  6.86,81.56 270 bottom
X9  [KK-156-4]  52.83,6.38 180 top
X10  [KK-156-4]  6.86,22.63 90 top
X11  [KK-156-4]  81.15,6.12 180 top
X12  [KK-156-4]  133.6,5.87 180 top

## Library data of the parts
24OHM 24OHMS 24OHMS1 24OHMS3 R1-R10 R12 R22-R33 R35-R39 R59-R78 R82-R90 R92 R94-R99 R103-R111 R113 R114 RES604 = SparkFun-Passives
C1-C16 C38-C45 C56-C68 C70-C85 C106-C113 C116 C117 = eagle-ltspice; SPICEMODEL: NONE; SPICEPREFIX: C
C21-C37 C69 C88-C105 C118 C119 = SparkFun-Capacitors
C46-C55 C86 C87 C114 C115 R11 R13-R21 R40 R2401-R2405 = rcl
D1-D3 = diode
IC1 = microchip-mcp41hvx1
IC2 = kblom; FARNELL: 1858056
IC3 = linear
IC5 IC6 = 74xx-little-us
IC7 = 40xx
J1-J3 SV1 SV2 = con-lsta; OC_FARNELL: unknown; OC_NEWARK: unknown
JP1-JP30 JP48 JP49 JP51-JP53 JP69 JP82-JP88 JP96-JP102 JP111 = jumper
JP81 = SparkFun-Connectors; PROD_ID: CONN-08278
K1 = relay; MPN: G5V-2 5DC; OC_FARNELL: 9949488; OC_NEWARK: 78K5703
K2 = relay; MPN: CP1SA-12V-X; OC_FARNELL: unknown; OC_NEWARK: 96K2384
L1-L7 = inductors
LED2-LED4 = adafruit
LED5 LED23 LED24 = eagle-ltspice; SPICEMODEL: NONE; SPICEPREFIX: D; SPICETYPE: diode
LED6-LED8 LED10-LED20 LED26 = led
PTC PTC1 = resistor
Q1-Q3 Q6 Q8-Q13 Q17 Q19 = SparkFun-DiscreteSemi; PROD_ID: TRANS-08345
Q4 Q5 Q18 = SparkFun-DiscreteSemi; PROD_ID: TRANS-08285
Q7 = crystal; MF: Abracon Corporation; MPN: ASFL1-125.000MHZ-EC-T; OC_FARNELL: 1838931; OC_NEWARK: 19M1882
SV3-SV5 = con-lstb; OC_FARNELL: unknown; OC_NEWARK: unknown
TP1-TP149 TP151-TP225 TP228-TP233 = testpad
U1 = shit; MANUFACTURER_PART_NUMBER: cp2130-gm; VENDOR: Silicon Labs
U2 = version2; MANUFACTURER_PART_NUMBER: tms570ls0432_pz_100; VENDOR: TEXAS INSTRUMENTS
U3 U4 U7 U18 = shit; MANUFACTURER_PART_NUMBER: lm1085_ktt_3; VENDOR: Texas Instruments
U5 = shit; BASE_PN: LM1084; COMP: TypeLDO; LIBRARY: ReferenceLM1084IS; PARTNUMBER: LM1084IS-33; PIN: Count3; SYMBOL: NameLM1084IS-33; TYPE: LM1084IS-3.3; VENDOR: NationalSemiconductor; VERSION: 1
U6 = shit; DATASHEETURL: http://www.ti.com/lit/gpn/TPS3514; DESCRIPTION: 3 Ch Supervisor with Over Current Detect for Switchmode Power Supplies; FAMILY_NAME: SUPERVISOR AND RESET IC; GENERIC_PART_NUMBER: TPS3514; INDUSTRY_STD_PKG_TYPE: SOIC; MANUFACTURER: Texas Instruments; MANUFACTURER_PART_NUMBER: tps3514_d_14; PACKAGE_DESIGNATOR: D; PIN_COUNT: 14; VENDOR: Texas Instruments
U8 = SparkFun-DigitalIC
U9 U11-U17 U19 U20 = digital-isolator
U10 = shit; DATASHEETURL: http://www.ti.com/lit/gpn/SN65HVDA100-Q1; DESCRIPTION: LIN Physical Interface; FAMILY_NAME: LIN TRANSCEIVER; GENERIC_PART_NUMBER: SN65HVDA100-Q1; INDUSTRY_STD_PKG_TYPE: SOIC; MANUFACTURER: Texas Instruments; MANUFACTURER_PART_NUMBER: sn65hvda100-q1_d_8; PACKAGE_DESIGNATOR: D; PIN_COUNT: 8; VENDOR: Texas Instruments
U$1-U$3 = freescalemod
U$4 U$8 U$11 U$13 U$14 U$16-U$20 U$22-U$32 = shit
U$5 U$7 U$9 = connectors
U$6 = xilinx_devices_V6
U$10 U$12 = shit; MANUFACTURER_PART_NUMBER: lm25061pmm-1nopb; VENDOR: National
U$15 U$21 = version2
X1-X12 = con-molex; OC_FARNELL: unknown; OC_NEWARK: unknown